# EAGLE board extension_board_0_1 (EAGLE 6.5.0)

Size 160.02 x 100 mm. Coordinates in mm from the lower left corner, seen from the top.
Outline: 0,0 160,0 160.02,20.32 93.98,20.32 93.98,80.01 160,80.01 160,100 0,100 0,0
Copper layers (1*16): Top 0.035mm / dielectric 1.5mm / Bottom 0.035mm
Design rules "default": minimum track width 10mil, minimum drill 24mil, track to track 8mil, track to pad 8mil, pad to pad 8mil, via to via 8mil, smd to smd 8mil, copper to edge 40mil, drill to drill 8mil, minimum pad ring 10mil, minimum via ring 8mil, stop-mask expansion 4mil, vias tented up to drill 0mil, thermal gap 10mil

## Footprints (pad centres in the part's own frame; a part is rotated, then mirrored left to right if it is on the bottom)
MA04-1 = drill 1.016 long: 1 -3.81,0; 2 -1.27,0; 3 1.27,0; 4 3.81,0
MKDSN1,5/2-5,08 = drill 1.3 pad 2: 1 -2.561,0.025; 2 2.519,0.025
C1206 = smd 1.6 x 1.8: 1 -1.4,0; 2 1.4,0
SMC_B = smd 1.6 x 2.4: + -1.5,0; - 1.5,0
SMB = smd 2.4 x 2.4: A 2.2,0; C -2.2,0
1X02 = drill 1.016 long: 1 -1.27,0; 2 1.27,0
JP1 = drill 0.914 long: 1 0,-1.27; 2 0,1.27
INDUKTOR = smd 5.5 x 3: P$1 6,-0.25; P$2 6,12.25
MA08-3 = drill 1.016 octagon: 1-1 -8.89,5.08; 1-2 -6.35,5.08; 1-3 -3.81,5.08; 1-4 -1.27,5.08; 1-5 1.27,5.08; 1-6 3.81,5.08; 1-7 6.35,5.08; 1-8 8.89,5.08; 2-1 -8.89,2.54; 2-2 -6.35,2.54; 2-3 -3.81,2.54; 2-4 -1.27,2.54; 2-5 1.27,2.54; 2-6 3.81,2.54; 2-7 6.35,2.54; 2-8 8.89,2.54; 3-1 -8.89,0; 3-2 -6.35,0; 3-3 -3.81,0; 3-4 -1.27,0; 3-5 1.27,0; 3-6 3.81,0; 3-7 6.35,0; 3-8 8.89,0
SO8-FET = smd 0.6 x 1.6: 1 -1.905,-2.6; 2 -0.635,-2.6; 3 0.635,-2.6; 4 1.905,-2.6; 5 1.905,2.6; 6 0.635,2.6; 7 -0.635,2.6; 8 -1.905,2.6 | drill 0.7: D1 -1.27,0.635; D2 0,0.635; D3 1.27,0.635
R1206 = smd 1.6 x 1.803: 1 -1.422,0; 2 1.422,0
P1-13 = drill 1.321 pad 2.159 octagon: TP 0,0
XBEE = drill 0.8 pad 1.27: 1 -11,9; 2 -11,7; 3 -11,5; 4 -11,3; 5 -11,1; 6 -11,-1; 7 -11,-3; 8 -11,-5; 9 -11,-7; 10 -11,-9; 11 11,-9; 12 11,-7; 13 11,-5; 14 11,-3; 15 11,-1; 16 11,1; 17 11,3; 18 11,5; 19 11,7; 20 11,9
S-PDSO-G08 = smd 0.4 x 1.2: 1 -0.975,-2.157; 2 -0.325,-2.157; 3 0.325,-2.157; 4 0.975,-2.157; 5 0.975,2.157; 6 0.325,2.157; 7 -0.325,2.157; 8 -0.975,2.157 | smd 1.73 x 1.78: TH 0,0
MA03-2 = drill 1.016: 1 -2.54,-1.27 | drill 1.016 octagon: 2 -2.54,1.27; 3 0,-1.27; 4 0,1.27; 5 2.54,-1.27; 6 2.54,1.27
FE10-2W = drill 1.016 octagon: 1 -11.43,1.27; 2 -11.43,-1.27; 3 -8.89,1.27; 4 -8.89,-1.27; 5 -6.35,1.27; 6 -6.35,-1.27; 7 -3.81,1.27; 8 -3.81,-1.27; 9 -1.27,1.27; 10 -1.27,-1.27; 11 1.27,1.27; 12 1.27,-1.27; 13 3.81,1.27; 14 3.81,-1.27; 15 6.35,1.27; 16 6.35,-1.27; 17 8.89,1.27; 18 8.89,-1.27; 19 11.43,1.27; 20 11.43,-1.27
2X02 = drill 1.016 octagon: 1 -1.27,-1.27; 2 -1.27,1.27; 3 1.27,-1.27; 4 1.27,1.27
057-040-1 = drill 1 octagon: 1 -24.13,-1.27; 2 -24.13,1.27; 3 -21.59,-1.27; 4 -21.59,1.27; 5 -19.05,-1.27; 6 -19.05,1.27; 7 -16.51,-1.27; 8 -16.51,1.27; 9 -13.97,-1.27; 10 -13.97,1.27; 11 -11.43,-1.27; 12 -11.43,1.27; 13 -8.89,-1.27; 14 -8.89,1.27; 15 -6.35,-1.27; 16 -6.35,1.27; 17 -3.81,-1.27; 18 -3.81,1.27; 19 -1.27,-1.27; 20 -1.27,1.27; 21 1.27,-1.27; 22 1.27,1.27; 23 3.81,-1.27; 24 3.81,1.27; 25 6.35,-1.27; 26 6.35,1.27; 27 8.89,-1.27; 28 8.89,1.27; 29 11.43,-1.27; 30 11.43,1.27; 31 13.97,-1.27; 32 13.97,1.27; 33 16.51,-1.27; 34 16.51,1.27; 35 19.05,-1.27; 36 19.05,1.27; 37 21.59,-1.27; 38 21.59,1.27; 39 24.13,-1.27; 40 24.13,1.27
MA06-2 = drill 1.016 octagon: 1 -6.35,-1.27; 2 -6.35,1.27; 3 -3.81,-1.27; 4 -3.81,1.27; 5 -1.27,-1.27; 6 -1.27,1.27; 7 1.27,-1.27; 8 1.27,1.27; 9 3.81,-1.27; 10 3.81,1.27; 11 6.35,-1.27; 12 6.35,1.27
MA05-2 = drill 1.016 octagon: 1 -5.08,-1.27; 2 -5.08,1.27; 3 -2.54,-1.27; 4 -2.54,1.27; 5 0,-1.27; 6 0,1.27; 7 2.54,-1.27; 8 2.54,1.27; 9 5.08,-1.27; 10 5.08,1.27

## Placement (x,y rotation side)
9DOF  I2C  [MA04-1]  50.8,7.62 270 top
BATTERY  MKDSN1,5/2-5,08  [MKDSN1,5/2-5,08]  73.66,5.08 0 top
C1  4,7u  [C1206]  66.04,55.88 0 top
C2  470n  [C1206]  76.2,63.5 90 top
C3  1n  [C1206]  50.8,63.5 0 top
C4  7,5n  [C1206]  78.74,53.34 0 top
C5  39u  [SMC_B]  55.88,36.83 90 top
D1  B340LB  [SMB]  67.31,52.07 180 top
I2C0  [1X02]  43.18,5.08 270 top
I2C1  [1X02]  43.18,11.43 90 top
JP1  [JP1]  69.85,85.09 180 top
JP2  [JP1]  64.77,85.09 180 top
L1  33u  [INDUKTOR]  80.01,34.29 180 top
PWM_IN  8RX  [MA08-3]  81.28,96.52 180 top
PWM_OUT  8RX  [MA08-3]  54.61,96.52 180 top
Q1  SI4401BDY  [SO8-FET]  72.39,43.18 270 top
R1  274k  [R1206]  82.55,63.5 90 top
R2  1,62k  [R1206]  69.85,63.5 90 top
R3  0,01  [R1206]  55.88,57.15 0 top
R4  10k  [R1206]  57.15,49.53 0 top
R5  1,15k  [R1206]  60.96,63.5 90 top
SPI  SPI_MAIN  [MA04-1]  49.53,21.59 180 top
SPI_SS  SPI_SS  [MA04-1]  49.53,27.94 0 top
TP-12V  TPPAD1-13  [P1-13]  86.36,13.97 0 top
TP-BAT  TPPAD1-13  [P1-13]  69.85,12.7 0 top
TP-GND  TPPAD1-13  [P1-13]  91.44,13.97 0 top
U1  XBEE  [XBEE]  16.51,86.36 90 top
U2  LM5085  [S-PDSO-G08]  62.23,43.18 0 top
UART  UART  [MA03-2]  26.67,6.35 180 top
ULPI1  [FE10-2W]  85.09,35.56 90 top
ULPI2  [FE10-2W]  85.09,64.77 90 top
VCC-3V3  [2X02]  58.42,11.43 0 top
VCC-5V  [2X02]  58.42,3.81 0 top
VCC-12V  MKDSN1,5/2-5,08  [MKDSN1,5/2-5,08]  88.9,5.08 0 top
X1  057-040-1  [057-040-1]  34.29,43.18 90 top
X2  057-040-1  [057-040-1]  17.78,43.18 90 top
X3  [MA06-2]  35.56,87.63 90 top
X4  [MA05-2]  10.16,6.35 180 top

## Library data of the parts
9DOF D1 L1 PWM_IN PWM_OUT SPI SPI_SS U2 UART = multicopter
BATTERY VCC-12V = con-phoenix-508; MPN: MKDSN 1,5/2-5.08; OC_FARNELL: 1792903; OC_NEWARK: 30M2397
C1-C4 = eagle-ltspice; SPICEMODEL: NONE; SPICEPREFIX: C
C5 = resistor
I2C0 I2C1 VCC-3V3 VCC-5V = pinhead
JP1 JP2 = jumper
Q1 = probox-parts
R1-R5 = eagle-ltspice; SPICEMODEL: NONE; SPICEPREFIX: R
TP-12V TP-BAT TP-GND = testpad
U1 = maxstream; MPN: XBP24-Z7UIT-004; OC_FARNELL: 1751799; OC_NEWARK: 34R5507
ULPI1 ULPI2 = multicopter; OC_FARNELL: unknown; OC_NEWARK: unknown
X1 X2 = con-panduit; OC_FARNELL: unknown; OC_NEWARK: unknown
X3 X4 = con-lstb; OC_FARNELL: unknown; OC_NEWARK: unknown

## Nets
+3V3: 9DOF.1 U1.1 ULPI1.19 ULPI1.20 ULPI2.19 ULPI2.20 VCC-3V3.2 VCC-3V3.4 X1.29 X2.29
+5V: JP1.2 JP2.2 UART.4 ULPI1.2 ULPI1.4 ULPI2.2 ULPI2.4 VCC-5V.2 VCC-5V.4 X1.11 X2.11
+12V: C4.1 C5.+ L1.P$2 R4.2 TP-12V.TP VCC-12V.1
GND: 9DOF.2 BATTERY.1 C1.2 C5.- D1.A PWM_IN.3-1 PWM_IN.3-2 PWM_IN.3-3 PWM_IN.3-4 PWM_IN.3-5 PWM_IN.3-6 PWM_IN.3-7 PWM_IN.3-8 PWM_OUT.3-1 PWM_OUT.3-2 PWM_OUT.3-3 PWM_OUT.3-4 PWM_OUT.3-5 PWM_OUT.3-6 PWM_OUT.3-7 PWM_OUT.3-8 R5.1 TP-GND.TP U1.10 U2.4 UART.1 ULPI1.17 ULPI1.18 ULPI2.17 ULPI2.18 VCC-3V3.1 VCC-3V3.3 VCC-5V.1 VCC-5V.3 VCC-12V.2 X1.12 X1.30 X2.12 X2.30
GPIO0: X2.31 X4.1
GPIO1: X2.32 X4.2
GPIO2: X2.33 X4.3
GPIO3: X2.34 X4.4
GPIO4: X2.35 X4.5
GPIO5: X2.36 X4.6
GPIO6: X2.37 X4.7
GPIO7: X2.38 X4.8
GPIO8: X2.39 X4.9
GPIO9: X2.40 X4.10
I2C-0-SCL: 9DOF.4 I2C0.2 X2.2
I2C-0-SDA: 9DOF.3 I2C0.1 X2.1
I2C-1-SCL: I2C1.1 X1.2
I2C-1-SDA: I2C1.2 X1.1
N$3: R1.2 U2.2
N$4: C2.2 U2.7
N$5: C3.1 R2.1 U2.1
N$6: BATTERY.2 C1.1 C2.1 C3.2 R1.1 R2.2 R3.2 TP-BAT.TP U2.8
N$7: Q1.1 Q1.2 Q1.3 R3.1 U2.5
N$8: C4.2 R4.1 R5.2 U2.3
N$9: Q1.4 U2.6
N$10: D1.C L1.P$1 Q1.5 Q1.6 Q1.7 Q1.8 Q1.D1 Q1.D2 Q1.D3
N$11: JP1.1 PWM_IN.2-1 PWM_IN.2-2 PWM_IN.2-3 PWM_IN.2-4 PWM_IN.2-5 PWM_IN.2-6 PWM_IN.2-7 PWM_IN.2-8
N$12: JP2.1 PWM_OUT.2-1 PWM_OUT.2-2 PWM_OUT.2-3 PWM_OUT.2-4 PWM_OUT.2-5 PWM_OUT.2-6 PWM_OUT.2-7 PWM_OUT.2-8
N$23: U1.5 X3.11
N$24: U1.14 X3.12
N$25: U1.20 X3.10
N$26: U1.19 X3.8
N$27: U1.18 X3.6
N$28: U1.17 X3.4
N$29: U1.11 X3.2
N$30: U1.15 X3.1
N$31: U1.9 X3.3
N$32: U1.4 X3.5
N$33: U1.6 X3.7
N$34: U1.13 X3.9
PWM_IN1: PWM_IN.1-1 X2.13
PWM_IN2: PWM_IN.1-2 X2.14
PWM_IN3: PWM_IN.1-3 X2.15
PWM_IN4: PWM_IN.1-4 X2.16
PWM_IN5: PWM_IN.1-5 X2.17
PWM_IN6: PWM_IN.1-6 X2.18
PWM_IN7: PWM_IN.1-7 X2.19
PWM_IN8: PWM_IN.1-8 X2.20
PWM_OUT1: PWM_OUT.1-1 X2.21
PWM_OUT2: PWM_OUT.1-2 X2.22
PWM_OUT3: PWM_OUT.1-3 X2.23
PWM_OUT4: PWM_OUT.1-4 X2.24
PWM_OUT5: PWM_OUT.1-5 X2.25
PWM_OUT6: PWM_OUT.1-6 X2.26
PWM_OUT7: PWM_OUT.1-7 X2.27
PWM_OUT8: PWM_OUT.1-8 X2.28
SPI_CLK: SPI.1 X1.3
SPI_MISO: SPI.4 X1.5
SPI_MOSI: SPI.3 X1.4
SPI_SS: SPI.2 X1.6
SPI_SS0: SPI_SS.1 X1.7
SPI_SS1: SPI_SS.2 X1.8
SPI_SS2: SPI_SS.3 X1.9
SPI_SS3: SPI_SS.4 X1.10
UART_CTS: UART.3 X2.10
UART_RTS: UART.6 X2.9
UART_RX: UART.2 X2.7
UART_TX: UART.5 X2.8
ULPI1_CLK: ULPI1.10 X1.14
ULPI1_D0: ULPI1.1 X1.25
ULPI1_D1: ULPI1.3 X1.24
ULPI1_D2: ULPI1.5 X1.23
ULPI1_D3: ULPI1.7 X1.22
ULPI1_D4: ULPI1.9 X1.21
ULPI1_D5: ULPI1.11 X1.20
ULPI1_D6: ULPI1.13 X1.19
ULPI1_D7: ULPI1.15 X1.18
ULPI1_DIR: ULPI1.12 X1.15
ULPI1_NXT: ULPI1.14 X1.16
ULPI1_RST: ULPI1.8 X1.13
ULPI1_STP: ULPI1.16 X1.17
ULPI2_CLK: ULPI2.10 X1.27
ULPI2_D0: ULPI2.1 X1.40
ULPI2_D1: ULPI2.3 X1.39
ULPI2_D2: ULPI2.5 X1.38
ULPI2_D3: ULPI2.7 X1.37
ULPI2_D4: ULPI2.9 X1.36
ULPI2_D5: ULPI2.11 X1.35
ULPI2_D6: ULPI2.13 X1.34
ULPI2_D7: ULPI2.15 X1.33
ULPI2_DIR: ULPI2.12 X1.28
ULPI2_NXT: ULPI2.14 X1.31
ULPI2_RST: ULPI2.8 X1.26
ULPI2_STP: ULPI2.16 X1.32
XBEE-CTS: U1.12 X2.5
XBEE-RTS: U1.16 X2.6
XBEE-RX: U1.2 X2.4
XBEE-TX: U1.3 X2.3

## Tracks (layer width: path | path; a pad name or v marks a point on that pad's centre or on a via)
+3V3  (9 unrouted)
+5V  (10 unrouted)
+12V  (5 unrouted)
GND  (38 unrouted)
GPIO0  (1 unrouted)
GPIO1  (1 unrouted)
GPIO2  (1 unrouted)
GPIO3  (1 unrouted)
GPIO4  (1 unrouted)
GPIO5  (1 unrouted)
GPIO6  (1 unrouted)
GPIO7  (1 unrouted)
GPIO8  (1 unrouted)
GPIO9  (1 unrouted)
I2C-0-SCL  (2 unrouted)
I2C-0-SDA  (2 unrouted)
I2C-1-SCL  (1 unrouted)
I2C-1-SDA  (1 unrouted)
N$3  (1 unrouted)
N$4  (1 unrouted)
N$5  (2 unrouted)
N$6  (8 unrouted)
N$7  (4 unrouted)
N$8  (3 unrouted)
N$9  (1 unrouted)
N$10  (8 unrouted)
N$11  (8 unrouted)
N$12  (8 unrouted)
N$23  (1 unrouted)
N$24  (1 unrouted)
N$25  (1 unrouted)
N$26  (1 unrouted)
N$27  (1 unrouted)
N$28  (1 unrouted)
N$29  (1 unrouted)
N$30  (1 unrouted)
N$31  (1 unrouted)
N$32  (1 unrouted)
N$33  (1 unrouted)
N$34  (1 unrouted)
PWM_IN1  (1 unrouted)
PWM_IN2  (1 unrouted)
PWM_IN3  (1 unrouted)
PWM_IN4  (1 unrouted)
PWM_IN5  (1 unrouted)
PWM_IN6  (1 unrouted)
PWM_IN7  (1 unrouted)
PWM_IN8  (1 unrouted)
PWM_OUT1  (1 unrouted)
PWM_OUT2  (1 unrouted)
PWM_OUT3  (1 unrouted)
PWM_OUT4  (1 unrouted)
PWM_OUT5  (1 unrouted)
PWM_OUT6  (1 unrouted)
PWM_OUT7  (1 unrouted)
PWM_OUT8  (1 unrouted)
SPI_CLK  (1 unrouted)
SPI_MISO  (1 unrouted)
SPI_MOSI  (1 unrouted)
SPI_SS  (1 unrouted)
SPI_SS0  (1 unrouted)
SPI_SS1  (1 unrouted)
SPI_SS2  (1 unrouted)
SPI_SS3  (1 unrouted)
UART_CTS  (1 unrouted)
UART_RTS  (1 unrouted)
UART_RX  (1 unrouted)
UART_TX  (1 unrouted)
ULPI1_CLK  (1 unrouted)
ULPI1_D0  (1 unrouted)
ULPI1_D1  (1 unrouted)
ULPI1_D2  (1 unrouted)
ULPI1_D3  (1 unrouted)
ULPI1_D4  (1 unrouted)
ULPI1_D5  (1 unrouted)
ULPI1_D6  (1 unrouted)
ULPI1_D7  (1 unrouted)
ULPI1_DIR  (1 unrouted)
ULPI1_NXT  (1 unrouted)
ULPI1_RST  (1 unrouted)
ULPI1_STP  (1 unrouted)
ULPI2_CLK  (1 unrouted)
ULPI2_D0  (1 unrouted)
ULPI2_D1  (1 unrouted)
ULPI2_D2  (1 unrouted)
ULPI2_D3  (1 unrouted)
ULPI2_D4  (1 unrouted)
ULPI2_D5  (1 unrouted)
ULPI2_D6  (1 unrouted)
ULPI2_D7  (1 unrouted)
ULPI2_DIR  (1 unrouted)
ULPI2_NXT  (1 unrouted)
ULPI2_RST  (1 unrouted)
ULPI2_STP  (1 unrouted)
XBEE-CTS  (1 unrouted)
XBEE-RTS  (1 unrouted)
XBEE-RX  (1 unrouted)
XBEE-TX  (1 unrouted)
(copper drawn outside any net)
  shapes: Bottom area x7